# Altium PCB PCB1.PcbDoc (part 7 of 7)
Units mm, origin at the board's own origin, x right, y up, seen from the top; angles counter-clockwise.
Board outline 168 x 107.92 mm, 4 copper layers (Top Layer, POWER_LAYER, GND_LAYER, Bottom Layer), stack 1.182 mm thick; 507 components, 566 nets, 2495 pads, 1244 vias.
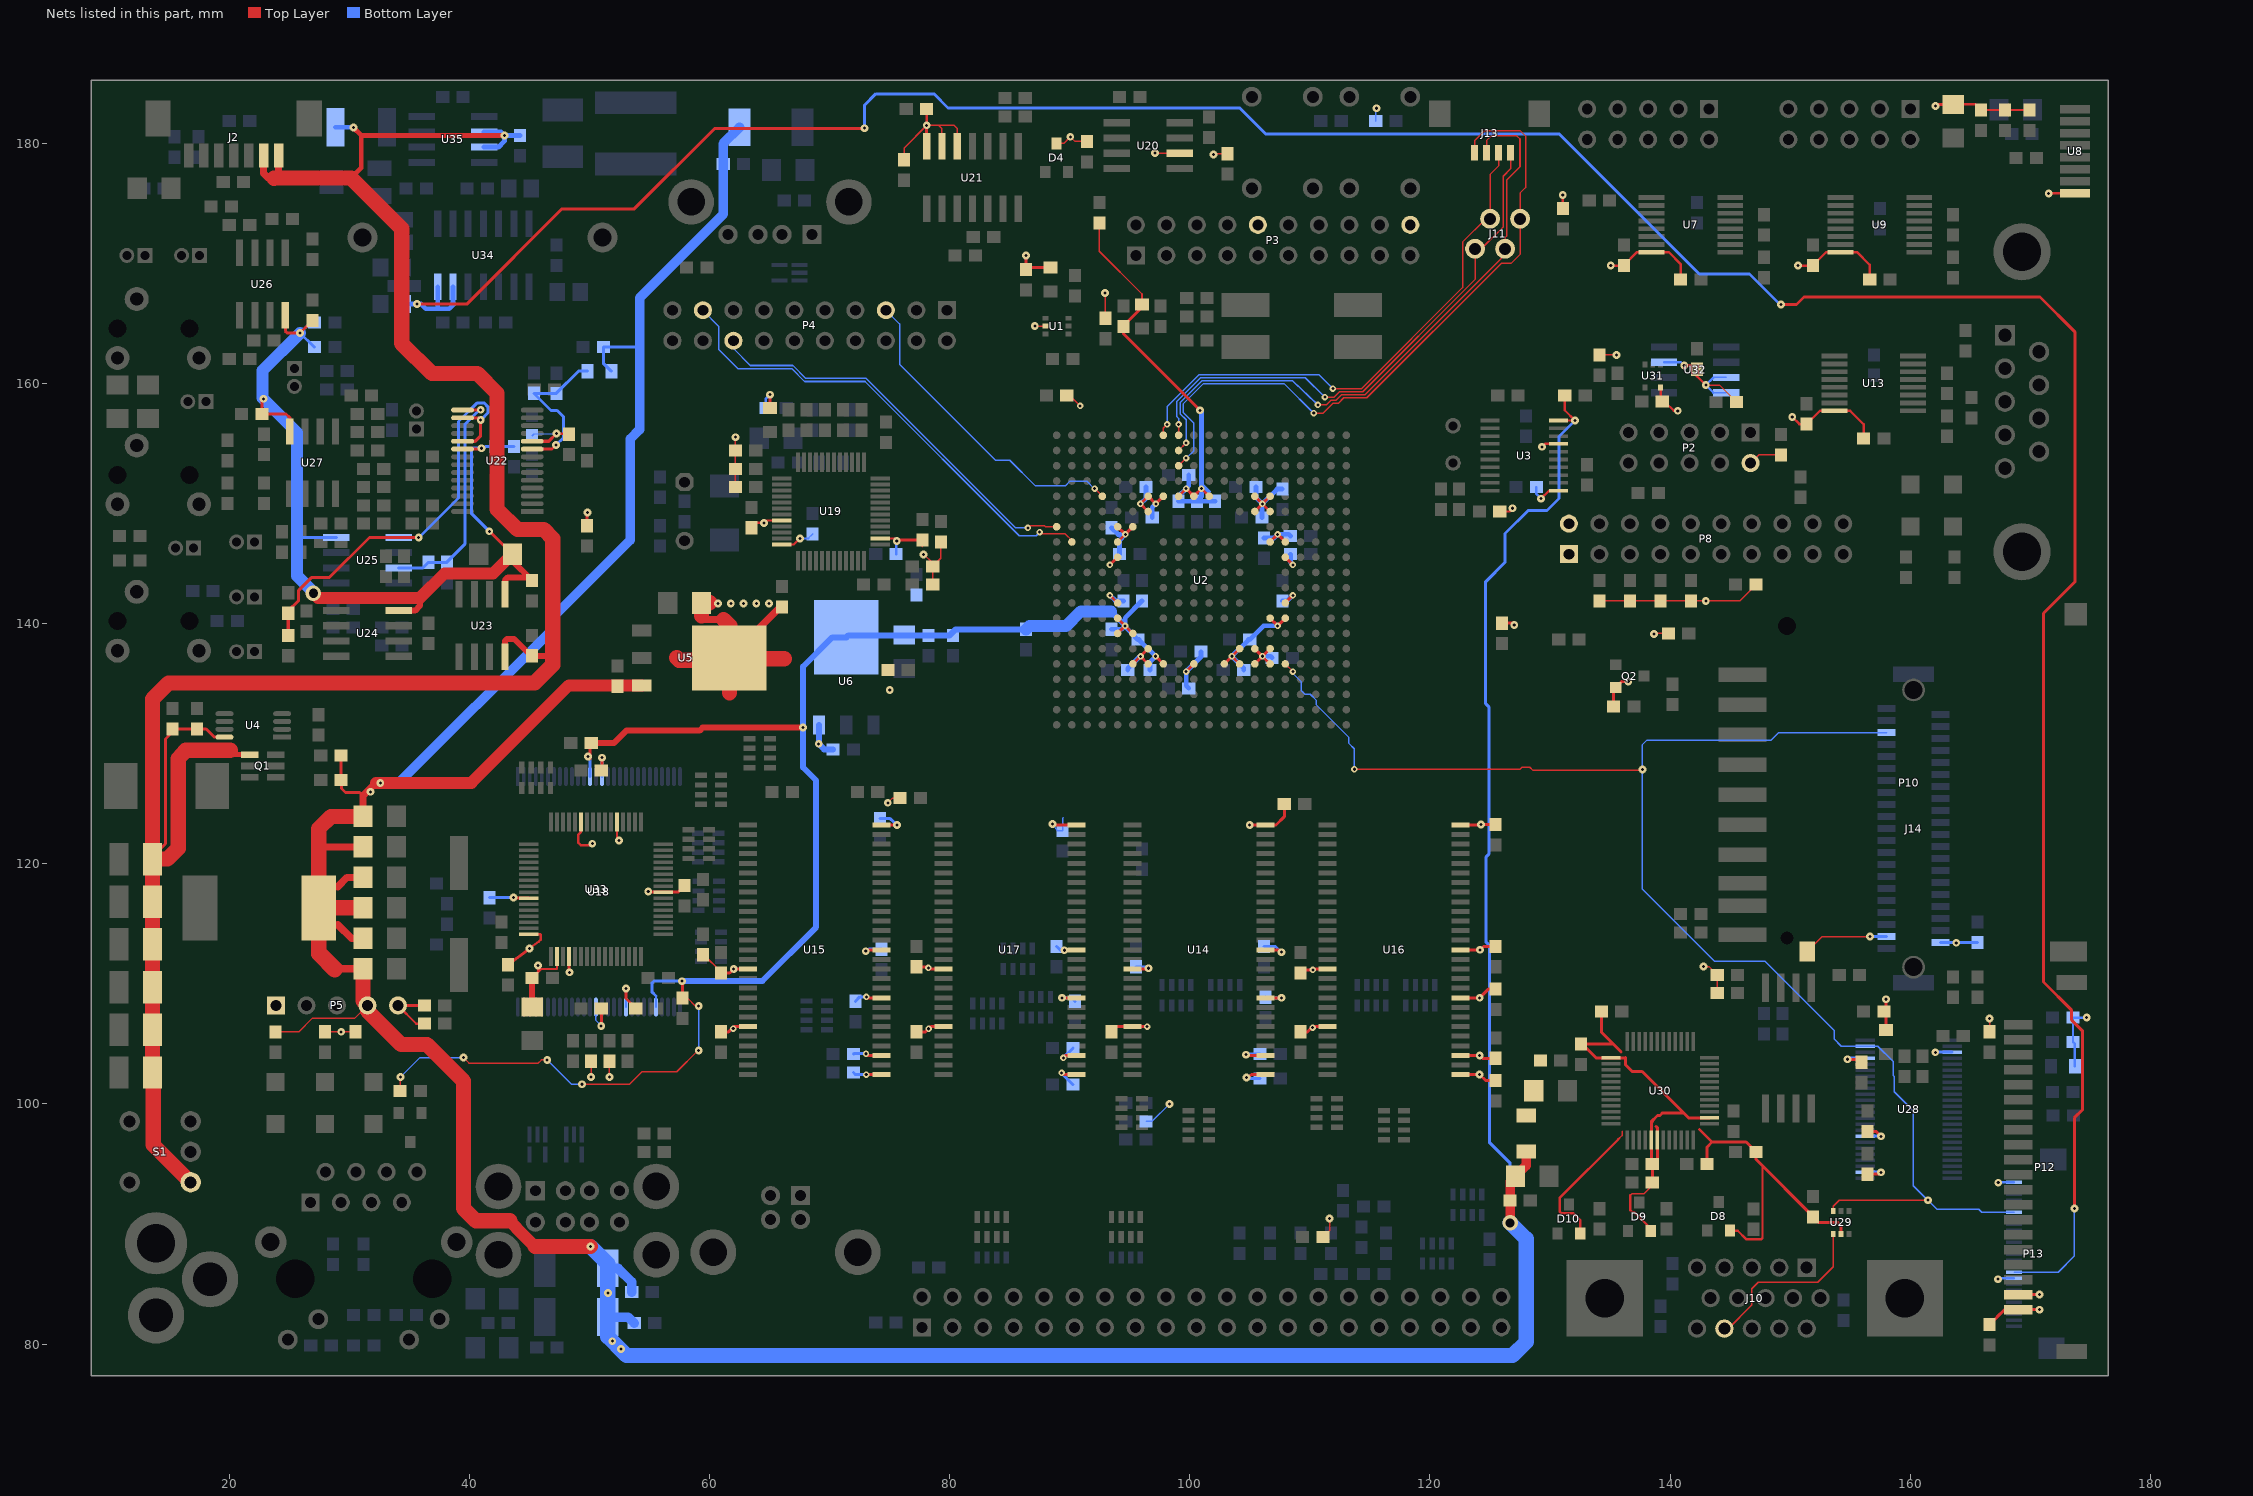
[diagram p9: the nets of this part, all layers, seen from the top]

## Via types
v1: diameter 0.54, hole 0.254, Top Layer to Bottom Layer, tented both sides, 504 vias
v2: diameter 0.65, hole 0.254, Top Layer to Bottom Layer, 387 vias
v3: diameter 0.65, hole 0.254, Top Layer to Bottom Layer, tented both sides, 325 vias
v4: diameter 0.54, hole 0.254, Top Layer to Bottom Layer, 25 vias
v5: diameter 1.27, hole 0.75, Top Layer to Bottom Layer, 2 vias
v6: diameter 0.65, hole 0.254, Top Layer to Bottom Layer, tented bottom, 1 vias

## Nets (pads, with @x,y where several pads share a name; then routed paths per layer and width w, separated by ;. In a path a pad name is that pad's centre, name@x,y a point inside that pad or via, vN(x,y) a via of type N, cw(c..) or ccw(c..) an arc to the next point about the centre after c; other vN are vias at no path point) (continued)
V4: C223.1 P13.16 U34.13 U34.14 | length 248.2
  Top Layer w0.25: v2(35.62,166.624) 39.764,166.624 47.7,174.56 53.72,174.56 60.42,181.26 72.88,181.26 v2(72.9,181.28) ; v2(149.24,166.6) 150.54,166.6 151.16,167.22 170.82,167.22 173.72,164.32 173.72,143.48 171.107,140.867 171.107,110.153 173.46,107.8 173.46,106.98 174.34,106.1 174.34,99.5 173.68,98.84 v2(173.68,91.28)
  Bottom Layer w0.127: P13.16@168.656,85.972 172.332,85.972 173.68,87.32 v2(173.68,91.28)
  Bottom Layer w0.25: v2(72.9,181.28) 72.9,183.2 73.84,184.14 78.68,184.14 79.86,182.96 104.16,182.96 106.34,180.78 130.8,180.78 142.441,169.139 146.621,169.139 149.16,166.6 v2(149.24,166.6)
  Bottom Layer w0.4: C223.1@34.478,166.624 35.976,166.624 36.36,166.24 38.3,166.24 38.608,166.548 U34.13@38.608,168.063 ; 37.32,166.24 37.338,166.258 U34.14@37.338,168.063
V_CSYNC: J14.5 P13.6 U2.T5 U28.23 U29.3 | length 124.5
  Top Layer w0.127: U2.T5@107.95,136.652 108.58,136.022 v1(108.58,136.02) ; v1(113.7,127.88) 121,127.88 127.5,127.88 127.66,128.04 128.32,128.04 128.58,127.78 137.62,127.78 v3(137.7,127.86) ; U29.3@153.6,91.082 153.6,91.48 154.1,91.98 v3(161.48,91.98)
  Bottom Layer w0.127: v1(108.58,136.02) 108.58,135.86 109.26,135.18 109.26,134.46 109.6,134.12 110.02,134.12 110.54,133.6 110.54,133.24 113.254,130.526 113.254,130.026 113.7,129.58 v1(113.7,127.88) ; J14.5@158.036,130.936 149.06,130.936 148.433,130.309 138.073,130.309 137.7,129.936 137.7,117.88 139.018,116.562 143.68,111.9 147.88,111.9 153.674,106.106 153.674,105.406 154.27,104.81 157.31,104.81 158.592,103.528 158.592,102.368 158.68,102.279 158.68,101.018 160.26,99.438 160.26,93.18 v3@161.47,91.97 ; v3(161.48,91.98) 162.242,91.218 165.714,91.218 165.96,90.972 P13.6@168.656,90.972
V_CSYNC_VGA: J10.14 U29.4 | length 14.8
  Top Layer w0.127: J10.14@144.526,81.28 144.84,81.28 146.8,83.24 146.8,84.6 147.34,85.14 152.3,85.14 153.6,86.44 U29.4@153.6,89.182
VCC5V0: C4.2 C57.2 C60.2 C62.2 C64.2 C67.2 C70.2 C89.2 C90.2 C91.2 C152.2 C173.1 C190.1 C193.2 C197.2 F1.1 F2.1 F3.1 L3.2 L6.2 L8.1 P5.4 R31.1 R94.2 U3.20 U5.3 | length 369.3
  Top Layer w0.127: R94.2@23.828,106.002 25.762,106.002 26.88,107.12 30.412,107.12 P5.4@31.496,108.204
  Top Layer w0.2: U3.20@130.708,156.932 v2@132.072,156.932 ; C4.2@131.23,159.004 131.23,157.79 v2(132.08,156.94)
  Top Layer w0.25: R31.1@29.298,129.032 C62.2@29.298,127 29.32,126.978 29.32,126.28 29.66,125.94 30.84,125.94 31.112,125.668
  Top Layer w0.6: 27.432,113.1 29.28,111.252 C57.2@31.112,111.252 ; 27.44,121.412 C197.2@31.112,121.412 ; 29.009,114.935 30.152,113.792 C67.2@31.112,113.792 ; 29.009,118.089 29.792,118.872 C64.2@31.112,118.872 ; C70.2@31.112,123.952 31.112,125.668 32.184,126.74 ; C60.2@52.308,135.026 C60.2@52.472,134.862
  Top Layer w0.8: v5(126.68,90.1) 126.68,93.536 128.016,94.872 L8.1@128.016,96.036
  Top Layer w1: 32.184,126.74 40.14,126.74 48.262,134.862 U5.3@54.34,134.862 ; 43.34,90.26 43.867,89.733 43.867,89.693 45.44,88.12
  Top Layer w1.27: L3.2@27.612,116.332 C152.2@31.052,116.332 ; 28.76,111.16 27.432,112.488 27.432,122.932 28.452,123.952 C70.2@31.112,123.952 ; C57.2@31.112,111.252 31.112,108.588 P5.4@31.496,108.204 31.496,107.744 34.3,104.94 36.46,104.94 39.5,101.9 39.5,91.3 40.54,90.26 43.34,90.26 ; 45.44,88.12 v2(50.08,88.12)
  Bottom Layer w0.25: L6.2@51.8,161.036 51.142,161.694 C173.1@51.142,163.068 54.148,163.068 54.16,163.08 ; 54.136,161.036 54.16,161.06 ; v5(126.68,90.1) 126.68,95.06 124.94,96.8 124.94,113.2 124.68,113.46 124.68,120.58 124.9,120.8 124.9,133.08 124.64,133.34 124.64,143.5 126.26,145.12 126.26,147.52 128.18,149.44 129.74,149.44 130.74,150.44 130.74,155.6 v2(132.08,156.94)
  Bottom Layer w0.8: v2(32.56,126.74) 34.08,126.74 46.94,139.58 46.94,140.54 53.38,146.98 53.38,155.4 54.16,156.18 54.16,167.14 61.126,174.106 61.126,179.998 F3.1@62.484,181.356 ; F2.1@51.516,82.24 53.206,82.24 C89.2@53.714,81.732 ; F1.1@51.516,86.304 52.376,86.304 53.506,85.174 C90.2@53.506,84.328
  Bottom Layer w1.27: v2(50.08,88.12) 51.52,86.68 51.52,86.308 F1.1@51.516,86.304 51.516,80.604 52.816,79.304 52.816,79.284 53.06,79.04 126.88,79.04 128.02,80.18 128.02,88.76 v5(126.68,90.1)
  other v2: 52.62,79.58 51.888,80.232 51.516,84.26 31.74,126
VCC5V0_VGA: C69.2 C187.1 C199.1 C200.1 C201.1 C203.1 C205.1 C206.1 D8.2 D9.2 D10.2 L8.2 R147.1 U29.5 U30.13 U30.29 U30.30 U30.38 | length 76.5
  Top Layer w0.127: 135.69,97.05 136,97.36 136,97.72 ; 136.7,92.38 136.846,92.526 137.846,92.526 138.518,93.198 C206.1@138.518,93.472
  Top Layer w0.2: D10.2@132.522,89.224 132.522,90.318 131.96,90.88 130.96,90.88 130.8,91.04 130.8,92.16 135.69,97.05 ; 136.7,92.38 136.7,91.14 136.84,91 137,91 138.386,89.614 D9.2@138.386,89.4 ; D8.2@145.002,89.436 145.644,89.436 146.34,88.74 147.62,88.74 147.7,88.82 147.7,94.84
  Top Layer w0.25: C200.1@132.588,104.99 135.27,104.99 ; C200.1@132.69,104.99 133.838,103.842 136.262,103.842 ; R147.1@134.278,107.696 134.278,105.982 135.92,104.34 ; 136.28,103.86 136.28,103.26 136.84,102.7 137.68,102.7 141.538,98.842 U30.38@143.292,98.842 ; C206.1@138.518,93.472 C203.1@138.518,94.996 138.442,95.072 138.442,98.446 138.518,98.522 138.442,98.522 138.96,99.04 139.16,99.04 139.38,99.26 141.12,99.26 ; 138.84,98.12 138.942,98.018 C203.1@138.942,95.42 ; 142.46,97.86 143.5,96.82 ; C205.1@143.09,94.996 143.09,96.41 143.5,96.82 ; U29.5@154.25,89.182 154.25,89.85 153.98,90.12 152.362,90.12 C187.1@151.892,90.59 151.892,90.648 147.154,95.386 C201.1@147.154,96.012 146.346,96.82 143.5,96.82
VCC12: C6.2 C17.2 C38.2 C49.2 C50.2 C51.2 C56.2 C151.1 J2.1 J2.2 L10.1 P5.1 Q1.4 R26.1 R168.1 S1.3 U4.8 U23.8 U35.6 U35.7 | length 199.7
  Top Layer w0.25: C56.2@13.592,120.396 13.592,120.612 14.66,121.68 14.66,130.4 15.49,131.23 18.05,131.23 18.724,130.556 U4.8@19.584,130.556 ; 19.88,129.1 20.06,129.46 ; 46.894,137.326 46.914,137.326 46.92,137.32
  Top Layer w0.4: 19.88,129.1 Q1.4@21.694,129.1 ; 30.132,177.128 30.978,177.974 30.978,180.682 ; v2(30.32,181.34) 30.978,180.682 ; v2(42.898,180.682) 30.978,180.682
  Top Layer w0.5: U23.8@42.938,137.242 42.938,138.558 43.12,138.74 43.7,138.74 45.114,137.326 46.894,137.326
  Top Layer w0.6: J2.2@22.842,178.988 22.842,177.498 23.212,177.128 ; 24.092,177.128 J2.1@24.092,178.988
  Top Layer w1.27: C38.2@13.592,102.616 13.592,133.732 14.92,135.06 45.42,135.06 46.92,136.56 46.92,147.1 46.18,147.84 43.98,147.84 42.28,149.54 42.28,159.2 40.64,160.84 36.86,160.84 34.34,163.36 34.34,172.92 30.132,177.128 23.7,177.12 ; C56.2@13.592,120.396 14.84,120.396 15.72,121.276 15.72,128.76 16.36,129.46 20.06,129.46 ; C38.2@13.64,102.42 13.64,96.596 S1.3@16.764,93.472
  Bottom Layer w0.4: L10.1@28.838,181.356 v2@30.304,181.356 ; U35.7@41.208,179.705 42.405,179.705 42.898,180.198 v2(42.898,180.682) ; U35.6@41.208,180.975 42.605,180.975 v2(42.898,180.682) ; R168.1@44.196,180.682 v2(42.898,180.682)
VCC_5V0_AD: C68.2 C155.1 C157.1 C160.1 C162.1 C183.2 C184.1 R126.1 U22.20 U23.1 U24.8 U25.8 U26.8 U27.8 | length 82.6
  Top Layer w0.25: v2(22.82,158.74) 22.694,158.614 C162.1@22.694,157.48 24.7,157.48 25.019,157.161 U27.8@25.019,156.016 ; U26.8@24.65,165.69 24.65,164.37 24.8,164.22 v2(25.878,164.22) R126.1@26.924,165.266 ; U22.20@39.412,154.552 40.912,154.552 v2(40.98,154.62) ; v2(41.64,147.7) 41.66,147.7 C68.2@43.564,145.796
  Top Layer w0.5: U24.8@34.096,141.097 35.457,141.097 35.86,141.5 35.86,142.14 ; U23.1@42.938,142.442 42.938,143.618 43.18,143.86 C155.1@44.95,143.86 ; C68.2@43.564,145.796 43.564,145.246 C155.1@45.212,143.598
  Top Layer w1: v5(26.98,142.54) 27.38,142.14 35.86,142.14 37.92,144.2 41.968,144.2 C68.2@43.564,145.796
  Bottom Layer w0.25: 25.64,147.2 25.647,147.193 U25.8@28.896,147.193 ; C183.2@27.09,163.068 27.03,163.068 v2(25.878,164.22) 26.758,165.1 C184.1@27.09,165.1 ; v2(41.64,147.7) 40.14,149.2 40.14,154.48 40.28,154.62 41.186,154.62 41.34,154.774 C160.1@43.688,154.774
  Bottom Layer w1: v2(25.878,164.22) 22.74,161.082 22.74,158.82 25.64,155.92 25.64,143.98 26.98,142.64 v5(26.98,142.54)
VCC_5V0_I2S: C165.2 C166.1 L6.1 U22.9 | length 13.2
  Top Layer w0.25: U22.9@45.212,154.552 46.872,154.552 v2(47.2,154.88)
  Bottom Layer w0.127: C166.1@45.364,159.176 C166.1@45.364,159.194
  Bottom Layer w0.25: C166.1@45.364,159.176 46.78,157.76 47.3,157.76 47.84,157.22 47.84,155.52 v2(47.2,154.88) ; C166.1@45.364,159.194 47.22,159.194 49.062,161.036 L6.1@49.8,161.036
VCCCORE: C12.2 C13.1 C14.2 C15.1 C16.2 C24.1 C25.2 C26.1 C27.2 C34.1 C35.2 C36.1 C37.2 C45.1 C46.2 C47.1 C48.2 C52.2 C63.2 C66.2 C127.2 C129.2 L1.1 R63.2 R99.2 U2.E7 U2.E8 U2.E13 U2.E14 U2.F7 U2.F14 U2.H5 U2.J16 U2.K16 U2.L16 U2.M5 U2.N5 U2.N6 U2.R8 U2.R13 U2.T8 U2.T13 U6.4 U18.13 U18.33 | length 197.9
  Top Layer w0.127: R99.2@34.202,101.092 34.24,101.13 v2(34.24,102.24) ; v2(39.48,103.86) 39.94,103.4 45.72,103.4 45.98,103.66 v2(46.46,103.66) ; v2(49.36,101.64) 53.32,101.64 54.36,102.68 57.26,102.68 59.02,104.44 v2(59.08,104.44) ; C129.2@49.79,129.813 C129.2@50.026,129.577 ; C127.2@57.742,108.819 58.141,108.819 58.8,108.16 v2(59.08,108.16) ; R63.2@92.456,173.394 92.456,171.024 96.012,167.468 L1.1@96.012,166.372 ; U2.E7@93.98,139.192 U2.E7@93.98,139.2 ; U2.E8@93.98,140.46 U2.E8@93.98,140.462 ; C52.2@94.488,164.758 C52.2@94.488,164.848 ; U2.F7@95.248,139.192 U2.F7@95.25,139.192
  Top Layer w0.25: v2@50.026,128.741 C129.2@50.026,129.577 ; C127.2@57.742,108.819 v2@57.742,110.181 ; U2.E7@93.98,139.2 v1(94.61,139.83) ; U2.E8@93.98,140.462 U2.F7@95.25,139.192 ; U2.E13@93.98,146.812 U2.F14@95.25,148.082 95.25,148.074 v1(94.62,147.444) 94.618,147.444 U2.E14@93.98,148.082 ; C52.2@94.488,164.758 94.488,164.132 v2(100.84,157.78) ; C52.2@94.488,164.848 L1.1@96.012,166.372 ; v1(97.15,137.29) 97.152,137.29 U2.H5@97.79,136.652 ; U2.J16@99.06,150.622 99.06,150.63 v1(99.69,151.26) 99.692,151.26 U2.K16@100.33,150.622 100.33,150.63 v1(100.96,151.26) ; v1@100.962,151.26 U2.L16@101.6,150.622 ; U2.M5@102.87,136.652 U2.N6@104.14,137.922 ; v1@103.508,137.29 v1(103.5,137.29) 104.138,136.652 U2.N5@104.14,136.652 ; U2.R8@106.68,140.462 107.31,139.832 v1(107.31,139.83) 107.942,140.462 U2.T8@107.95,140.462 ; U2.R13@106.68,146.812 106.68,146.82 v1(107.31,147.45) 107.312,147.45 U2.T13@107.95,146.812
  Top Layer w0.5: C129.2@50.126,130.048 52.008,130.048 53.06,131.1 59.16,131.1 59.42,131.36 v2(67.78,131.36)
  Bottom Layer w0.127: v2(34.24,102.24) 35.86,103.86 v2(39.48,103.86) ; v2(46.46,103.66) 48.48,101.64 v2(49.36,101.64) ; U18.33@55.526,108.073 55.526,108.997 ; v2(59.08,104.44) v2(59.08,108.16)
  Bottom Layer w0.25: v2(49.86,128.94) 50.04,128.64 U18.13@50.026,127.273 ; 55.526,108.997 55.182,109.341 55.182,110.061 55.362,110.241 v2(57.702,110.221)
  Bottom Layer w0.4: C24.1@93.472,139.534 94.314,139.534 v1(94.61,139.83) 94.61,139.744 C14.2@95.67,138.684 95.756,138.684 v1(97.15,137.29) 96.686,136.826 C13.1@96.686,136.144 ; C15.1@93.472,147.994 94.022,147.444 v1(94.62,147.444) 94.146,146.97 C16.2@94.146,145.796 ; v1@94.61,139.85 94.61,140.496 C35.2@96.012,141.898 ; C34.1@99.06,150.202 C12.2@102.108,150.202 ; C34.1@99.08,150.66 v1@99.68,151.26 ; v1(99.69,151.26) 99.91,151.48 C26.1@99.91,152.4 ; C45.1@100.584,150.202 100.96,150.578 v1@100.96,151.2 ; v2(100.84,157.78) 100.96,157.66 v1(100.96,151.26) ; 100.96,151.58 101.54,151 ; C36.1@104.482,136.144 104.482,136.308 v1(103.5,137.29) 104.894,138.684 C27.2@104.99,138.684 106.136,139.83 v1(107.31,139.83) ; C37.2@106.172,147.154 107.014,147.154 v1(107.31,147.45) 108.24,147.45 C46.2@108.37,147.32
  Bottom Layer w0.5: v2(57.702,110.221) 64.381,110.241 68.86,114.72 68.86,126.94 67.78,128.02 67.78,136.44 70.212,138.872 U6.4@71.375,138.872 71.543,139.04 76.228,139.04 76.242,139.026 79.986,139.026 80.494,139.534 C48.2@86.36,139.534 ; 93.42,141.04 v1@94.61,139.85
  Bottom Layer w1: C48.2@86.36,139.534 86.626,139.8 89.68,139.8 90.92,141.04 93.42,141.04
VCCIO: C3.2 C8.1 C9.2 C10.1 C11.2 C18.2 C19.1 C20.2 C21.1 C22.2 C28.2 C29.1 C30.2 C31.1 C32.2 C39.2 C40.1 C41.2 C42.1 C43.2 C53.2 C58.2 C61.2 C65.2 C73.2 C75.1 C78.1 C81.1 C83.1 C86.1 C88.1 C98.2 C99.1 C100.2 C101.1 C102.2 C103.1 C104.2 C105.1 C106.2 C107.1 C108.2 C109.1 C110.2 C111.1 C112.2 C113.1 C114.2 C115.1 C116.2 C117.1 C118.2 C119.1 C120.2 C121.1 C122.2 C123.1 C124.2 C125.1 C126.2 C128.2 C131.2 C133.2 C138.2 C146.2 C185.1 C186.1 C188.1 C189.2 C191.2 C192.1 C194.1 C195.2 C209.1 C210.1 C211.2 C212.1 C213.1 C214.1 C215.1 C216.1 C217.1 C218.1 D4.3 J14.39 J14.40 L2.1 L4.2 L7.1 L9.1 P2.2 P3.10 P3.20 P5.5 P8.1 P8.2 P10.11 P12.1 P12.2 P13.1 P13.17 Q2.2 R1.2 R12.1 R15.2 R16.2 R17.2 R18.2 R23.1 R24.2 R36.2 R37.2 R38.2 R39.2 R41.2 R42.2 R45.2 R46.2 R48.1 R49.1 R50.1 R54.2 R57.2 R58.2 R77.2 R80.2 R84.2 R86.2 R93.1 R96.2 R97.2 R98.2 R106.2 R136.2 R143.2 R144.2 R151.1 R153.2 R155.1 R158.2 U1.5 U2.E9 U2.E12 U2.F5 U2.G5 U2.G6 U2.G15 U2.G16 U2.H16 U2.K5 U2.P5 U2.P6 U2.P15 U2.P16 U2.R5 U2.R6 U2.R15 U2.R16 U2.T9 U2.T12 U3.11 U3.17 U5.4 U6.3 U7.16 U8.1 U9.16 U13.16 U14.1 U14.3 U14.9 U14.14 U14.27 U14.43 U14.49 U15.1 U15.3 U15.9 U15.14 U15.27 U15.43 U15.49 U16.1 U16.3 U16.9 U16.14 U16.27 U16.43 U16.49 U17.1 U17.3 U17.9 U17.14 U17.27 U17.43 U17.49 U18.15 U18.38 U18.43 U19.14 U19.44 U19.48 U20.2 U21.12 U21.13 U21.14 U22.10 U28.2 U28.8 U28.21 U28.27 U31.5 U32.3 U32.7 U32.8 U33.2 U33.4 U33.24 U33.37 U33.43 U33.58 U33.64 | length 374.1
  Top Layer w0.127: R96.2@27.94,106.006 R98.2@30.48,106.006 ; 49.28,122.659 U33.43@49.28,123.487 ; v2(50.122,102.241) R151.1@50.122,103.563 ; v2@50.122,121.561 v2(50.22,121.68) ; v2(50.96,106.5) v2@50.972,106.591 ; v2(51.022,128.841) v2@51.142,129.001 ; R155.1@51.646,103.563 51.646,102.257 v2(51.662,102.241) ; v2@54.873,117.678 v2(54.88,117.7) ; R158.2@59.436,112.434 59.506,112.434 60.96,110.98 C99.1@60.96,110.91 ; v2(62.14,155.54) R50.1@62.142,151.384 ; v2(74.84,125.08) 75.236,125.476 R18.2@75.858,125.476 ; v2@75.358,147.102 v2(75.58,146.88) v2@75.678,146.978 ; R84.2@76.2,178.65 76.2,179.64 v2(78.078,181.518) ; C215.1@77.6,147.102 C215.1@77.724,146.978 77.724,146.416 ; v2(77.82,145.76) 78.92,144.78 R57.2@78.574,144.78 ; v2@78.08,181.52 80.36,181.52 80.618,181.262 U21.12@80.618,179.772 ; R54.2@78.574,143.256 R57.2@78.574,144.78 ; 79.06,181.52 79.348,181.232 U21.13@79.348,179.772 ; R58.2@79.248,146.812 79.248,145.454 R57.2@78.574,144.78 ; C53.2@86.36,169.506 C53.2@86.51,169.656 ; v2(87.08,164.8) 87.086,164.794 U1.5@87.974,164.794 ; v2@88.56,123.24 v2(88.56,123.32) ; D4.3@88.9,180.016 89.496,180.016 v2(90.04,180.56) 90.426,180.174 R24.2@91.44,180.174 ; R23.1@89.75,159.004 89.996,159.004 v1(90.86,158.14) ; v2(92.94,167.54) 92.964,166.544 R1.2@92.964,165.442 ; v3(97.1,179.22) 97.123,179.197 U20.2@99.145,179.197 ; v2(101.98,179.08) 102.058,179.158 R80.2@103.124,179.158 ; v2@104.86,123.24 v2(104.98,123.24) ; R77.2@111.086,88.9 111.64,89.454 v3(111.64,90.46) ; C18.2@131.04,174.61 C18.2@131.04,174.84 ; R46.2@134.112,141.898 R45.2@136.652,141.898 R41.2@141.732,141.898 141.734,141.9 145.798,141.9 R39.2@147.154,143.256 ; R153.2@134.112,162.394 135.526,162.394 v2(135.54,162.38) ; v2(138.66,139.14) 138.712,139.192 R93.1@139.866,139.192 ; C210.1@139.212,158.634 C210.1@139.35,158.496 C210.1@139.564,158.496 ; C209.1@141.922,161.52 C209.1@142.24,161.202 142.24,160.62 ; v2(142.78,111.44) 143.234,111.44 R143.2@143.93,110.744 R144.2@143.93,109.22 ; v2(142.98,159.88) 144.11,159.88 R16.2@145.526,158.464 ; P2.2@146.708,153.384 147.382,154.058 R15.2@149.248,154.058 ; P10.11@151.443,112.697 152.682,113.936 v2(156.656,113.936) ; C78.1@151.892,169.838 C78.1@151.898,169.838 ; R38.2@165.418,183.264 R38.2@165.888,182.794 ; v2(166.62,107.12) 166.624,107.116 R136.2@166.624,106.006 ; v2(171.54,175.84) v2@171.548,175.848
  Top Layer w0.2: P5.5@34.036,108.204 35.56,106.68 C41.2@36.234,106.68 ; U33.64@44.93,114.137 45.886,114.137 45.942,114.081 45.942,113.92 45.942,113.701 45.762,113.521 v2(44.98,112.94) ; C218.1@45.208,110.509 45.94,111.241 47.278,111.241 ; C218.1@45.702,111.003 v2(45.702,111.541) ; 47.28,111.239 U33.2@47.28,112.287 ; 49.28,122.659 49.034,122.413 49.034,121.789 49.262,121.561 v2@50.122,121.561 ; U33.37@52.28,123.487 52.28,122.103 v2(52.442,121.941) ; C216.1@63.5,147.994 63.906,148.4 v2(64.52,148.4) 64.722,148.602 U19.44@66.004,148.602 ; v2@64.52,148.44 v2@64.56,148.44 ; U19.48@66.004,146.602 67.002,146.602 v2(67.52,147.1) ; U19.14@74.204,147.102 v2@75.358,147.102 ; v2@78.066,181.534 C213.1@78.066,182.88 ; R12.1@125.818,149.352 126.612,149.352 v2(126.88,149.62) ; v2(129.26,150.42) 129.922,151.082 U3.11@130.708,151.082 ; v2(129.34,154.74) 129.582,154.982 U3.17@130.708,154.982 ; v2(131.06,175.72) 131.064,175.716 C18.2@131.064,174.586 ; v2(135.058,169.838) C83.1@136.144,169.838 137.259,170.953 139.887,170.953 140.882,169.958 C75.1@140.882,168.656 ; C210.1@139.212,158.634 U31.5@139.212,159.694 ; C210.1@139.564,158.496 140.32,157.74 v2(140.64,157.74) ; v2(141.18,161.52) C209.1@141.922,161.52 ; 142.24,160.62 v2(142.98,159.88) ; v2(150.18,157.22) 150.77,156.63 C88.1@151.384,156.63 152.499,157.745 154.995,157.745 156.122,156.618 C86.1@156.122,155.448 ; v2(150.662,169.838) C78.1@151.892,169.838 153.007,170.953 155.567,170.953 156.63,169.89 C81.1@156.63,168.656 ; C73.2@163.576,183.264 R38.2@165.418,183.264 ; R38.2@165.888,182.794 R36.2@169.952,182.794 ; v2@171.548,175.848 U8.1@173.736,175.848
  Top Layer w0.24: v2(53.022,109.621) 53.022,108.791 C126.2@53.844,107.969
  Top Layer w0.25: P5.5@34.036,108.204 C39.2@36.234,108.204 ; C212.1@43.18,111.594 v2(44.98,112.94) ; v2(43.66,117.2) 43.723,117.137 U33.58@44.93,117.137 ; U22.10@45.212,155.202 46.602,155.202 v2(47.24,155.84) C146.2@48.26,155.79 ; U33.4@48.28,112.287 48.28,111 v2(48.32,110.96) ; C20.2@49.784,148.17 49.784,149.224 v2(49.82,149.26) ; v2@50.972,106.591 C124.2@50.972,107.969 ; C128.2@50.972,127.781 51.022,128.281 v2(51.022,128.841) ; v2(54.88,117.7) 54.983,117.637 U33.24@56.13,117.637 57.351,117.637 C217.1@57.912,118.198 ; C100.2@60.96,106.006 61.586,106.006 62.02,106.44 U15.49@63.202,106.44 ; C99.1@60.96,110.91 61.67,110.91 v2(62,111.24) U15.43@63.202,111.24 ; v2(65.02,159.08) 65.024,159.076 L4.2@65.024,157.972 ; v2(73,112.72) 73.22,112.84 U15.14@74.302,112.84 ; v4@73.02,102.46 v4(73.04,102.44) U15.1@74.302,102.44 ; v4(73.02,104.18) 73.16,104.04 U15.3@74.302,104.04 ; v4(73.06,108.92) 73.14,108.84 U15.9@74.302,108.84 ; U15.27@74.302,123.24 v2@75.68,123.24 ; v2(75.6,123.24) v2@75.68,123.24 ; v2@75.678,146.978 C215.1@77.724,146.978 ; C106.2@77.216,106.006 77.986,106.006 78.42,106.44 U17.49@79.458,106.44 ; C105.1@77.216,111.418 78.142,111.418 78.32,111.24 U17.43@79.458,111.24 ; U21.14@78.078,179.772 v2(78.078,181.518) v2@78.08,181.52 ; C53.2@86.36,169.506 v2(86.36,170.68) ; C53.2@86.51,169.656 L2.1@88.392,169.656 ; v2(88.56,123.32) 88.64,123.24 U17.27@90.558,123.24 ; v2(89.34,108.84) U17.9@90.558,108.84 ; v4(89.46,103.84) 89.66,104.04 U17.3@90.558,104.04 ; v4@89.5,102.44 U17.1@90.558,102.44 ; v1(93.34,142.37) 93.978,141.732 U2.E9@93.98,141.732 ; v1(93.34,144.91) 93.972,145.542 U2.E12@93.98,145.542 ; C112.2@93.472,106.006 93.906,106.44 96.4,106.44 v4(96.44,106.44) ; U14.43@95.206,111.24 96.5,111.24 v2(96.56,111.3) ; U2.F5@95.25,136.652 U2.G6@96.52,137.922 ; v1@95.89,137.292 v1(95.89,137.284) 96.52,136.654 U2.G5@96.52,136.652 ; U2.G15@96.52,149.352 96.518,149.352 v1(95.88,149.99) 95.888,149.99 U2.G16@96.52,150.622 96.522,150.622 v1(97.16,149.984) 97.16,149.992 U2.H16@97.79,150.622 ; v1(99.69,136.02) 100.322,136.652 U2.K5@100.33,136.652 ; v2(104.68,104.1) 104.74,104.04 U14.3@106.306,104.04 ; v2(104.72,102.2) 105.14,102.44 U14.1@106.306,102.44 ; v2(104.98,123.24) 105.08,123.24 107.18,123.24 107.862,123.922 C110.2@107.862,124.968 ; U2.P5@105.41,136.652 U2.R6@106.68,137.922 ; U2.P15@105.41,149.352 U2.R16@106.68,150.622 106.672,150.622 v1(106.04,149.99) v1@106.042,149.99 ; U2.P16@105.41,150.622 U2.R15@106.68,149.352 ; v1@106.048,137.29 v1(106.04,137.29) 105.41,137.92 U2.P6@105.41,137.922 U2.R5@106.68,136.652 ; U14.9@106.306,108.84 v2(107.64,108.84) v2@107.6,108.86 ; U14.14@106.306,112.84 107.4,112.84 v2(107.64,112.64) ; U2.T9@107.95,141.732 107.95,141.74 v1(108.58,142.37) ; U2.T12@107.95,145.542 107.95,145.54 v1(108.58,144.91) ; C118.2@109.22,106.006 109.806,106.006 110.24,106.44 U16.49@111.462,106.44 ; C117.1@109.22,110.91 109.47,111.16 v4(110.24,111.16) 110.32,111.24 U16.43@111.462,111.24 ; U16.1@122.562,102.44 124.1,102.44 v2(124.12,102.46) 124.638,101.942 C119.1@125.476,101.942 ; U16.3@122.562,104.04 v2(124.14,104.04) 124.12,104.06 124.382,103.798 C120.2@125.476,103.798 ; U16.9@122.562,108.84 v2(124.14,108.84) 124.862,109.562 C61.2@125.476,109.562 ; U16.14@122.562,112.84 v2(124.18,112.84) 124.458,113.118 C121.1@125.476,113.118 ; U16.27@122.562,123.24 124.22,123.24 v2(124.26,123.28) 124.262,123.278 C116.2@125.476,123.278 ; C28.2@125.984,140.042 126.878,140.042 v2(127.02,139.9) ; 135.294,133.604 135.294,134.503 135.971,135.18 v2(136.52,135.18) ; v2(154.78,103.72) 155.702,103.72 C192.1@155.956,103.466 ; C195.2@156.464,94.146 157.426,94.146 v2(157.58,94.3) ; C189.2@156.464,97.702 157.178,97.702 v2(157.58,97.3) ; v2(157.98,108.72) 157.98,107.854 C194.1@157.822,107.696 157.988,107.53 L9.1@157.988,106.156 ; v2(162.12,183.14) 162.244,183.264 C73.2@163.576,183.264 ; C186.1@166.624,81.622 167.261,82.259 ; 167.262,82.26 167.862,82.86 v2(170.78,82.86) ; P12.2@169.013,84.11 170.77,84.11 v2(170.78,84.12)
  Top Layer w0.5: C218.1@45.208,110.509 C211.2@45.212,108.08
  Top Layer w0.6: U5.4@59.312,139.475 U5.4@61.64,137.147 65.883,141.39 C10.1@66.04,141.39 ; 59.312,140.66 59.312,140.38 59.332,140.36 61.16,140.36
  Top Layer w1.27: 57.26,137.16 57.453,136.967 U5.4@61.64,136.967 ; 59.312,140.66 C58.2@59.312,141.732 59.992,141.732 C58.2@60.02,141.76 ; 61.16,140.36 61.66,139.86 ; 61.424,140.096 61.424,137.363 61.707,137.08 66.2,137.08 ; 61.64,134.26 U5.4@61.64,137.147
  Bottom Layer w0.127: R106.2@45.212,155.652 45.35,155.79 v2(47.24,155.84) ; U18.43@50.526,108.073 50.526,106.957 v2@50.922,106.561 ; v2@51.022,128.581 v2(51.022,128.841) ; v2(53.022,109.621) v2@53.026,109.617 ; C138.2@68.194,147.1 C138.2@68.58,147.486 ; v2@75.526,147.028 v2(75.58,146.88) ; v2(88.56,123.32) 88.95,122.77 C104.2@89.408,122.77 89.408,123.788 89.44,123.82 ; R17.2@96.354,98.552 96.852,98.552 v2(98.3,100) ; R86.2@115.482,181.864 115.482,182.882 v2(115.54,182.94) ; 140.914,161.786 v2(141.18,161.52) ; U32.8@143.614,159.246 U32.8@144.698,159.246 ; U32.7@143.616,160.516 U32.7@144.698,160.516 ; v2(162.1,104.3) v2@162.11,104.31
  Bottom Layer w0.2: U18.38@53.026,108.073 v2@53.026,109.617 ; C131.2@64.682,157.988 64.68,158.76 v2(65.02,159.08) ; v2(67.52,147.1) C138.2@68.194,147.1 ; C133.2@75.526,145.796 v2@75.526,147.028 ; C3.2@128.866,151.384 128.866,150.814 v2(129.26,150.42) ; U32.3@139.498,161.786 140.914,161.786 ; U32.8@143.614,159.246 v2(142.98,159.88) U32.7@143.616,160.516 ; v2(167.32,85.4) 167.392,85.472 P13.17@168.656,85.472 ; v2(167.34,93.44) 167.372,93.472 P13.1@168.656,93.472 ; L7.1@173.72,103.124 173.72,105.006 C191.2@173.57,105.156 C188.1@173.57,107.188 v2(174.708,107.188) v2@174.72,107.2
  Bottom Layer w0.25: C214.1@41.656,117.182 41.674,117.2 v2(43.66,117.2) ; v2@51.022,128.581 U18.15@51.026,127.273 ; C101.1@71.97,102.616 72.146,102.44 v4(73.04,102.44) ; C122.2@71.97,104.14 72.01,104.18 v4(73.02,104.18) ; C102.2@72.136,108.546 72.51,108.92 v4(73.06,108.92) ; v2(73,112.72) 73.27,112.89 C103.1@74.302,112.89 ; C98.2@74.168,123.786 74.994,123.786 v2(75.6,123.24) ; C108.2@88.9,113.118 89.218,112.8 v2(89.54,112.8) ; v4(89.32,102.58) 89.5,102.358 C107.1@90.258,101.6 ; v2(89.34,108.84) 90.13,108.84 C109.1@90.424,108.546 ; v4(89.46,103.84) 90.258,104.638 C125.1@90.258,104.648 ; C111.1@95.504,111.418 96.442,111.418 v2(96.56,111.3) ; v2(104.68,104.1) 104.72,104.14 C123.1@105.83,104.14 ; v2(104.72,102.2) 104.992,102.108 C113.1@105.83,102.108 ; C114.2@106.172,113.118 107.122,113.118 v2(107.64,112.64) ; C115.1@106.306,108.89 106.356,108.84 v2(107.64,108.84) ; v2(154.78,103.72) 154.87,103.81 U28.21@156.254,103.81 ; U28.2@156.254,94.31 157.57,94.31 v2(157.58,94.3) ; U28.8@156.254,97.31 157.57,97.31 v2(157.58,97.3) ; v2@156.62,113.9 v2(156.656,113.936) J14.39@158.036,113.936 ; v2@162.11,104.31 U28.27@163.504,104.31 ; J14.40@162.536,113.436 163.824,113.436 v2(163.84,113.42) 163.87,113.45 C185.1@165.608,113.45
  Bottom Layer w0.4: v1(93.34,142.37) 93.812,141.898 C29.1@94.488,141.898 ; C43.2@94.83,136.144 94.83,136.27 v1@95.844,137.284 ; v1(95.88,149.99) 96.354,150.464 C11.2@96.354,151.384 ; C42.1@96.862,148.844 96.862,149.686 v1(97.16,149.984) ; C19.1@99.91,134.62 99.69,134.84 v1(99.69,136.02) 100.926,137.256 C21.1@100.926,137.668 ; C31.1@105.498,151.384 105.498,150.532 v1(106.04,149.99) 107.268,151.218 C9.2@107.696,151.218 ; C22.2@106.006,148.844 v1@106.006,149.956 ; v1(106.04,137.29) 106.716,137.29 C8.1@106.846,137.16 ; C40.1@107.696,141.898 108.108,141.898 v1(108.58,142.37) ; C30.2@108.37,145.796 108.37,145.12 v1(108.58,144.91)
  Bottom Layer w0.5: U6.3@69.09,131.572 69.09,130.01 v2(69.08,130) 69.54,129.54 C65.2@70.27,129.54
  other v2: 29.3,106.006 75,134.48 60.7,141.68 61.76,141.68 62.82,141.68 63.88,141.68 64.94,141.68 142.98,141.9
  other v4: 78.24,106.26 61.96,106.28 110.22,106.36 78.22,111.34
VDD: 
VQ1: C156.2 C158.2 U22.15 U25.3 | length 19.6
  Top Layer w0.2: v2@40.902,157.802 v2(40.92,157.82)
  Top Layer w0.25: U22.15@39.412,157.802 v2@40.902,157.802
  Bottom Layer w0.25: U25.3@34.096,144.653 36.107,144.653 C158.2@36.576,145.122 C156.2@38.1,145.122 39.6,146.622 39.6,156.6 40.82,157.82 v2(40.92,157.82)
VQ3VQ2: R104.1 R105.2 U22.16 U22.19 U25.1 | length 37.8
  Top Layer w0.25: R105.2@24.892,139.026 24.892,141.072 25.76,141.94 25.76,142.78 26.814,143.834 28.294,143.834 31.653,147.193 v2(35.76,147.193) ; 25.5,141.7 25.52,141.7 ; U22.19@39.412,155.202 40.462,155.202 40.92,155.66 v2(40.92,156.96) 40.728,157.152 U22.16@39.412,157.152
  Bottom Layer w0.25: U25.1@34.096,147.193 35.793,147.193 39.08,150.48 39.08,156.84 40.64,158.4 41.2,158.4 41.52,158.08 41.52,157.56 v2(40.92,156.96)
VS1: P4.17 U2.B13 | length 40.2
  Top Layer w0.127: v1(87.48,147.64) 87.62,147.5 89.6,147.5 90.17,146.93 U2.B13@90.17,146.812
  Bottom Layer w0.127: P4.17@59.436,166.116 59.436,166.084 60.74,164.78 60.74,162.86 62.341,161.259 66.828,161.259 67.907,160.18 72.938,160.18 85.79,147.328 87.194,147.328 87.48,147.614 v1(87.48,147.64)
VS2: P4.16 U2.A14 | length 33.9
  Top Layer w0.127: v1(86.5,147.98) 86.7,148.18 87.9,148.18 87.998,148.082 U2.A14@88.9,148.082
  Bottom Layer w0.127: P4.16@61.976,163.576 61.976,162.924 63.387,161.513 66.934,161.513 68.007,160.44 73.037,160.44 85.497,147.98 v1(86.5,147.98)
WP: P4.5 U2.D16 | length 26.7
  Top Layer w0.127: v1(92.07,151.26) 92.072,151.26 U2.D16@92.71,150.622
  Bottom Layer w0.127: P4.5@74.676,166.116 75.82,164.972 75.82,161.608 83.804,153.624 84.995,153.624 87.105,151.514 89.654,151.514 90.02,151.88 91.4,151.88 92.02,151.26 v1(92.07,151.26)
XM: J11.1 J13.4 U2.J18 | length 57.1
  Top Layer w0.127: U2.J18@99.06,153.162 99.06,153.17 v1(99.69,153.8) ; v1(110.32,157.54) 111.094,157.54 111.926,158.372 112.38,158.372 112.826,158.818 114.738,158.818 125.94,170.02 126.76,170.02 127.508,170.768 127.508,175.888 127.96,176.34 127.96,180.62 127.5,181.08 124.56,181.08 123.718,180.238 J13.4@123.718,179.223
  Bottom Layer w0.127: v1(99.69,153.8) 99.72,153.8 100.32,154.4 100.32,156.72 99.46,157.58 99.46,158.34 101.1,159.98 107.88,159.98 v1(110.32,157.54)
XP: J11.3 J13.2 U2.H20 | length 44.9
  Top Layer w0.127: U2.H20@97.79,155.702 97.79,156.29 v1(98.1,156.6) ; v1(111.92,159.58) 114.3,159.58 122.72,168 122.72,171.796 124.66,173.736 J11.3@125.008,173.736 125.008,177.428 125.718,178.138 J13.2@125.718,179.223
  Bottom Layer w0.127: v1(98.1,156.6) 98.1,158.08 100.78,160.76 110.74,160.76 v1(111.92,159.58)
YM: J11.4 J13.1 U2.J20 | length 45.4
  Top Layer w0.127: U2.J20@99.06,155.702 v1(99.06,156.6) ; v1(111.24,158.88) 112.02,158.88 112.466,159.326 114.406,159.326 123.758,168.678 J11.4@123.758,171.236 124.276,171.236 126.1,173.06 126.1,177.28 126.718,177.898 J13.1@126.718,179.223
  Bottom Layer w0.127: v1(99.06,156.6) 99.06,157.1 98.9,157.26 98.9,158.52 100.88,160.5 109.62,160.5 v1(111.24,158.88)
YP: J11.2 J13.3 U2.J19 | length 52.5
  Top Layer w0.127: U2.J19@99.06,154.432 99.06,154.44 v1(99.69,155.07) ; v1(110.66,158.24) 111.38,158.24 111.766,158.626 112.18,158.626 112.626,159.072 114.592,159.072 126.258,170.738 126.258,172.178 126.38,172.3 126.38,176.94 127.5,178.06 127.5,180.38 127.22,180.66 125.12,180.66 124.718,180.258 J13.3@124.718,179.223
  Bottom Layer w0.127: v1(99.69,155.07) 99.69,156.991 99.2,157.481 99.2,158.44 101,160.24 108.56,160.24 v1(110.66,158.24)
pads on no net: D4.2 J5.10 J5.11 J6.4 J6.5 J6.MH3 J6.MH4 J7.MH1 J7.MH2 J8.MH1 J8.MH2 J9.MH1 J9.MH2 J10.9 J10.15 J12.1 J13.5 J13.6 P6.1 P6.2 P6.7 P6.8 P6.10 P7.1 P7.2 P7.7 P7.8 P7.10 P8.17 P8.19 P9.20 P9.32 P9.34 P10.8 P10.9 P10.12 P10.13 P10.SYSPAD14 P10.SYSPAD15 P12.17 P12.18 P12.20 R76.4 R76.5 R90.3 R90.4 R90.5 R90.6 R180.1 R180.2 R180.7 R180.8 S1.1 S1.4 S1.5 U1.4 U2.H17 U2.K17 U2.K18 U2.K19 U2.K20 U2.U13 U2.W18 U2.W19 U3.4 U3.6 U3.9 U3.13 U3.19 U4.3 U5.2 U6.2 U7.7 U8.2 U14.4 U14.7 U14.10 U14.13 U14.15 U14.40 U14.42 U14.45 U14.48 U14.51 U15.4 U15.7 U15.10 U15.13 U15.15 U15.40 U15.42 U15.45 U15.48 U15.51 U16.4 U16.7 U16.10 U16.13 U16.15 U16.40 U16.42 U16.45 U16.48 U16.51 U17.4 U17.7 U17.10 U17.13 U17.15 U17.40 U17.42 U17.45 U17.48 U17.51 U18.56 U19.27 U20.6 U20.8 U21.11 U22.1 U22.2 U22.23 U22.28 U23.4 U23.5 U28.14 U28.43 U33.14 U33.15 U33.17 U33.18 U33.21 U33.22 U33.63 Y1.2 Y1.3

## Polygon pours and split planes (outlines as drawn)
GND on Top Layer (solid, remove dead copper): 47.56,78.08 47.56,81.68 55.48,81.68 56.1,82.3 57.12,82.3 57.12,78.08
GND on Top Layer (solid, remove dead copper): 9.18,100.46 12.44,100.46 12.44,122.32 13.08,122.96 13.08,132.34 12.24,133.18 10.2,133.18 9.2,132.18 9.2,100.46
GND on Top Layer (solid, remove dead copper): 9.2,100.46 9.2,100.92 12.44,100.92 12.44,86.6 14.6,86.6 23.62,95.62 39.5,95.62 39.5,90.8 40.04,90.26 43.32,90.26 45.312,88.268 51.32,88.268 51.32,78.08 9.2,78.08
GND on Top Layer (solid, remove dead copper): 51.44,79.133 51.783,78.79 52.957,78.79 53.113,78.947 51.44,80.62
GND on Top Layer (solid, remove dead copper): 168.133,141.087 142.857,141.087 141.657,139.887 141.657,114.431 143.957,112.131 168.133,112.131
GND on Top Layer (solid, remove dead copper): 9.2,174.18 15.26,174.18 16.769,175.689 20.229,175.689 23.48,178.94 29.08,178.94 29.08,184.44 9.2,184.44
VCC5V0 on Top Layer (solid, remove dead copper): 49.48,88.08 50.64,86.92 50.64,80.4 51.92,79.12 52.82,79.12 53.1,79.4 53.1,79.86 52.34,80.62 52.34,88.02 51.6,88.76 49.48,88.76
VCC5V0 on Top Layer (solid, remove dead copper): 23.89,109.882 30.247,109.882 30.247,107.112 32.727,107.112 32.727,108.762 32.217,109.272 32.217,110.032 32.21,110.032 32.21,125.52 33.23,126.54 33.23,127.2 32.97,127.46 31.32,127.46 30.34,126.48 30.34,126.14 29.542,125.342 25.75,125.342 25.75,123.681 23.89,121.821
VCC12 on Top Layer (solid, remove dead copper): 12.74,100.46 14.72,100.46 21.22,106.96 25.08,106.96 25.08,109.24 17.54,109.24 15.241,111.539 15.241,120.531 14.92,120.852 14.92,121.16 14.12,121.96 12.76,121.96 12.76,118.64 12.74,118.64
VCC5V0_VGA on Top Layer (solid): 141.942,96.992 127.76,96.992 126.58,98.172 126.58,104.62 128.68,106.72 134.98,106.72 136.442,105.258 141.942,105.258 143.292,103.908 143.292,98.342 141.942,96.992
VCCIO on Top Layer (solid, remove dead copper): 57.92,142.6 58.94,143.62 67.02,143.62 70.12,140.52 74.44,140.52 75.62,139.34 75.62,134.48 74.94,133.8 74.7,133.56 58.42,133.56 58.06,133.92 57.94,134.04 57.92,134.06 57.92,142.62
VCCIO on Top Layer (solid): 58.42,133.56 55.94,133.56 55.56,133.94 55.56,137.84 58.08,140.36 58.36,140.36 58.36,134.08 58.48,133.96 58.48,133.56
GND on Top Layer (solid, remove dead copper): 55.38,155 55.38,143.66 60.28,143.66 60.28,155.04 55.38,155.04
NetD3_2 on Top Layer (solid, remove dead copper): 15.292,112.686 21.572,112.686 21.572,120.746 24.752,123.926 24.892,124.066 24.892,128.786 16.792,128.786 16.792,120.646 15.612,119.466 15.612,112.666
GND on Top Layer (solid, remove dead copper): 32.48,109.88 32.48,125.32 32.98,125.82 35.34,125.82 36.04,125.12 36.04,110.56 35.28,109.8 32.5,109.8
GND on Top Layer (solid, remove dead copper): 39.5,91.3 40.54,90.26 43.34,90.26 45.44,88.16 51.16,88.16 51.16,80.9 53.98,78.08 129.62,78.08 129.62,86.54 125.42,90.74 125.42,95.2 124.4,96.22 88.637,96.22 86.913,97.944 61.22,97.944 57.204,101.96 39.5,101.96
VCCIO on POWER_LAYER (solid, remove dead copper): 8.72,133.18 8.78,133.18 8.78,77.76 8.76,77.74 176.26,77.74 176.26,185.06 8.76,185.06 8.76,174.84 29.54,174.84 29.54,166.28 35.96,159.86 45.74,159.86 45.74,145.06 47.02,143.78 47.02,136.38 45.58,134.94 8.72,134.94
GND on POWER_LAYER (solid, remove dead copper): 8.9,174.28 28.82,174.28 28.82,165.9 35.52,159.2 43.7,159.2 43.7,146 46.26,143.44 46.26,136.64 45.32,135.7 8.9,135.7
GND on GND_LAYER (solid, remove dead copper): 8.462,133.2 8.64,133.2 8.64,77.6 176.36,77.6 176.36,185.18 8.64,185.18 8.64,174.84 29.54,174.84 29.54,166.28 36,159.82 43.68,159.82 43.68,159.2 35.802,159.2 28.962,166.04 28.962,174.28 8.64,174.28 8.64,136.12 8.92,136.12 8.92,135.7 45.2,135.7 46.68,137.18 46.68,142.94 43,146.62 43,147.24 43.662,147.24 43.662,146.98 47.262,143.38 47.262,136.6 45.622,134.96 8.462,134.96
GND on Bottom Layer (solid, remove dead copper): 138.48,117.459 143.779,112.16 148.207,112.16 153.492,106.875 168.42,106.875 170.385,108.84 173.46,108.84 175.88,111.26 175.88,140.36 173.98,142.26 145.58,142.26 139.12,135.8 138.54,135.22 138.54,117.459
GND on Bottom Layer (solid, remove dead copper): 9.26,134.62 36.08,134.62 36.08,95.72 9.24,95.72 9.24,134.62
VCC5V0 on Bottom Layer (solid, remove dead copper): 32.2,125.52 31.38,125.52 31.08,125.82 31.08,126.4 32.08,127.4 32.86,127.4 33.14,127.12 33.14,126.28 32.38,125.52
VCCCORE on Bottom Layer (solid, remove dead copper): 66.74,135.26 74.42,135.26 77.22,138.06 81.2,138.06 81.92,138.78 87.14,138.78 87.74,139.38 87.74,140.02 87.14,140.62 81.62,140.62 79.16,143.08 66.72,143.08 66.72,135.26
VCCCORE on Bottom Layer (solid, remove dead copper): 74.42,135.26 74.76,135.26 77.56,138.06 81.2,138.06 81.2,140.6 74.5,140.6 74.5,135.26
VCCCORE on Bottom Layer (solid, remove dead copper): 93.34,151.26 93.34,136.144 108.58,136.144 108.58,151.34 93.34,151.34

## Keep-outs
Keep-Out Layer:
  lines w0.254: 8.51,76.99 8.51,185.32 ; 8.51,77.47 176.53,77.47 176.53,185.33 8.56,185.33

## Silkscreen, mask and mechanical layers (free items; w line width, h text height)
Top Overlay:
  lines w0.254: 15.46,178.44 15.46,177.8 15.64,177.62 16.72,177.62 18.06,176.28 ; 24.9,136.36 24.9,135.82 26.62,134.1 28.12,134.1 ; 26.44,138.06 26.44,136.54 27.18,135.8 27.96,135.8 ; 34.2,125.46 34.78,125.46 35.4,124.84 35.4,124 35.82,123.58 ; 34.4,109.84 35.12,109.84 35.4,110.12 35.4,135.46 35.82,135.88 ; 54.08,99.14 54.08,105.6 54.08,105.64 55.22,106.36 55.22,107.14 ; 54.86,106.76 55.22,107.14 ; 55.62,161.96 55.44,161.78 55.44,156.6 55.76,156.28 60.06,156.28 61.08,155.26 61.08,150.76 ; 55.64,106.72 55.22,107.14 ; 124.52,99.52 124.52,114.9 124.66,115.04 126.38,115.04 ; 126.38,110.08 126.38,116.72 ; 142.68,112.9 143.08,112.9 144.28,111.7 146.6,111.7 146.96,111.34 152.56,111.34 152.86,111.64 154.96,111.64 ; 155.1,94.7 155.1,98.58 155.12,98.56 155.72,98.56 ; 32.846,161.874 40.054,161.874 40.36,162.18 40.36,165.7 40.34,165.72 49.04,165.72 49.56,166.24 49.56,175.42 49.58,175.44 44.66,175.44 44.62,175.4 44.62,180.86 44.64,180.88 38.84,180.88 38.78,180.94 38.78,166.96 38.74,166.92 31.56,166.92 31.54,166.94 31.54,162.08 31.746,161.874 32.846,161.874 ; 32.846,161.874 33.26,161.46 33.26,159.62 ; 33.26,159.62 33.26,155.04 33.52,154.78 37.54,154.78 37.88,154.44 37.88,147.46 30.42,147.46 30.48,147.4 30.48,145.3 30.292,145.112 23.428,145.112 23.5,145.184 23.5,148.56 24.18,149.24 29.84,149.24 29.84,157.66 29.04,158.46 29.04,159.66 29.18,159.8 33.08,159.8 33.26,159.62 ; 55.22,107.14 55.22,107.14
Bottom Overlay:
  lines w0.127: 113.6,95.68 113.6,90.5 113.48,90.38 113.48,87.68 113.48,87.16 113.56,87.08 114.92,87.08
  lines w0.254: 40.68,175.74 40.68,175.22 41.06,174.84 45.46,174.84 46,174.3 ; 45.16,181.26 45.16,177.9 45.52,177.54 45.96,177.54 46.6,176.9 47.42,176.9 51.3,176.9 ; 50.98,174.52 47.883,174.52 47.683,174.32 46.02,174.32 46,174.3 ; 46,174.3 46,174.3
Mechanical 1:
  lines w0.254: 160.286,111.302 160.286,134.402
Mechanical 2:
  lines w0.254: 8.5,77.36 176.5,77.36 176.5,185.28 8.8,185.28 8.5,185.28 8.5,184.98 8.5,77.36
Drill Drawing:
  text ".LEGEND" at 193.06,73.64 h1.52
  text "Drill Drawing." at 193.06,71.1 h1.52

## Dimensions
8.51,76.99 to 8.51,185.32 on Mechanical 1
8.51,77.47 to 176.53,77.47 on Mechanical 1

## Text inside footprints (layer, text, board x,y; h text height)
C147: Top Overlay "+" at 24.811,142.99 h1.5 r180
C148: Top Overlay "+" at 24.811,138.418 h1.5 r180
C161: Top Overlay "+" at 38.12,154.636 h1.5 r90
C169: Top Overlay "+" at 24.811,147.562 h1.5 r180
C170: Top Overlay "+" at 24.65,164.003 h1.5 r270
C179: Top Overlay "+" at 19.22,146.14 h1.5 r180
C180: Top Overlay "+" at 19.06,156.96 h1.5 r180
C181: Top Overlay "+" at 14.78,169.44 h1.5 r180
C182: Top Overlay "+" at 19.12,169.24 h1.5 r180
J3: Mechanical 1 "PCB Edge" at 41.686,77.36 h0.2
J5: Top Overlay "6" at 173.841,163.151 h1.5 r270; Top Overlay "9" at 173.841,154.841 h1.5 r270; Top Overlay "5" at 164.44,150.48 h1.5 r270; Top Overlay "1" at 164.62,162.8 h1.5 r270
J13: Top Overlay "4" at 124.218,178.123 h1.5 r180; Top Overlay "1" at 126.968,178.123 h1.5 r180
P2: Top Overlay "10" at 135.024,153.892 h1.27 r180; Top Overlay "9" at 135.024,156.432 h1.27 r180; Top Overlay "1" at 148.74,156.432 h1.27 r180; Top Overlay "2" at 149.248,153.892 h1.27 r180
P3: Top Overlay "20" at 119.888,172.72 h1.27; Top Overlay "19" at 119.888,170.18 h1.27; Top Overlay "1" at 93.316,170.164 h1.27; Top Overlay "2" at 93.24,172.56 h1.27
P4: Top Overlay "20" at 55.372,164.084 h1.27 r180; Top Overlay "19" at 55.372,166.624 h1.27 r180; Top Overlay "1" at 82.296,166.624 h1.27 r180; Top Overlay "2" at 82.296,164.084 h1.27 r180
P6: Top Overlay "10" at 148.336,180.848 h1.27 r180; Top Overlay "9" at 148.336,183.388 h1.27 r180; Top Overlay "1" at 162.052,183.388 h1.27 r180; Top Overlay "2" at 162.56,180.848 h1.27 r180
P7: Top Overlay "10" at 131.572,180.848 h1.27 r180; Top Overlay "9" at 131.572,183.388 h1.27 r180; Top Overlay "1" at 145.288,183.388 h1.27 r180; Top Overlay "2" at 145.796,180.848 h1.27 r180
P8: Top Overlay "20" at 155.956,147.828 h1.27; Top Overlay "19" at 155.956,145.288 h1.27; Top Overlay "1" at 129.36,145.28 h1.27; Top Overlay "2" at 129.032,147.828 h1.27
P9: Top Overlay "1" at 73.28,80.9 h1.27; Top Overlay "2" at 73.24,83.38 h1.27; Top Overlay "40" at 127.98,83.416 h1.27; Top Overlay "39" at 127.98,80.876 h1.27
P13: Bottom Overlay "25" at 167.429,82.786 h1.5 r90; Bottom Overlay "1" at 167.556,93.722 h1.5 r90